# Altium PCB 球锁蓝牙20818.PcbDoc (part 3 of 3)
Units mm, origin at the board's own origin, x right, y up, seen from the top; angles counter-clockwise.
Board outline 49.43 x 48.4 mm, 2 copper layers (Top Layer, Bottom Layer); 90 components, 56 nets, 267 pads, 205 vias.
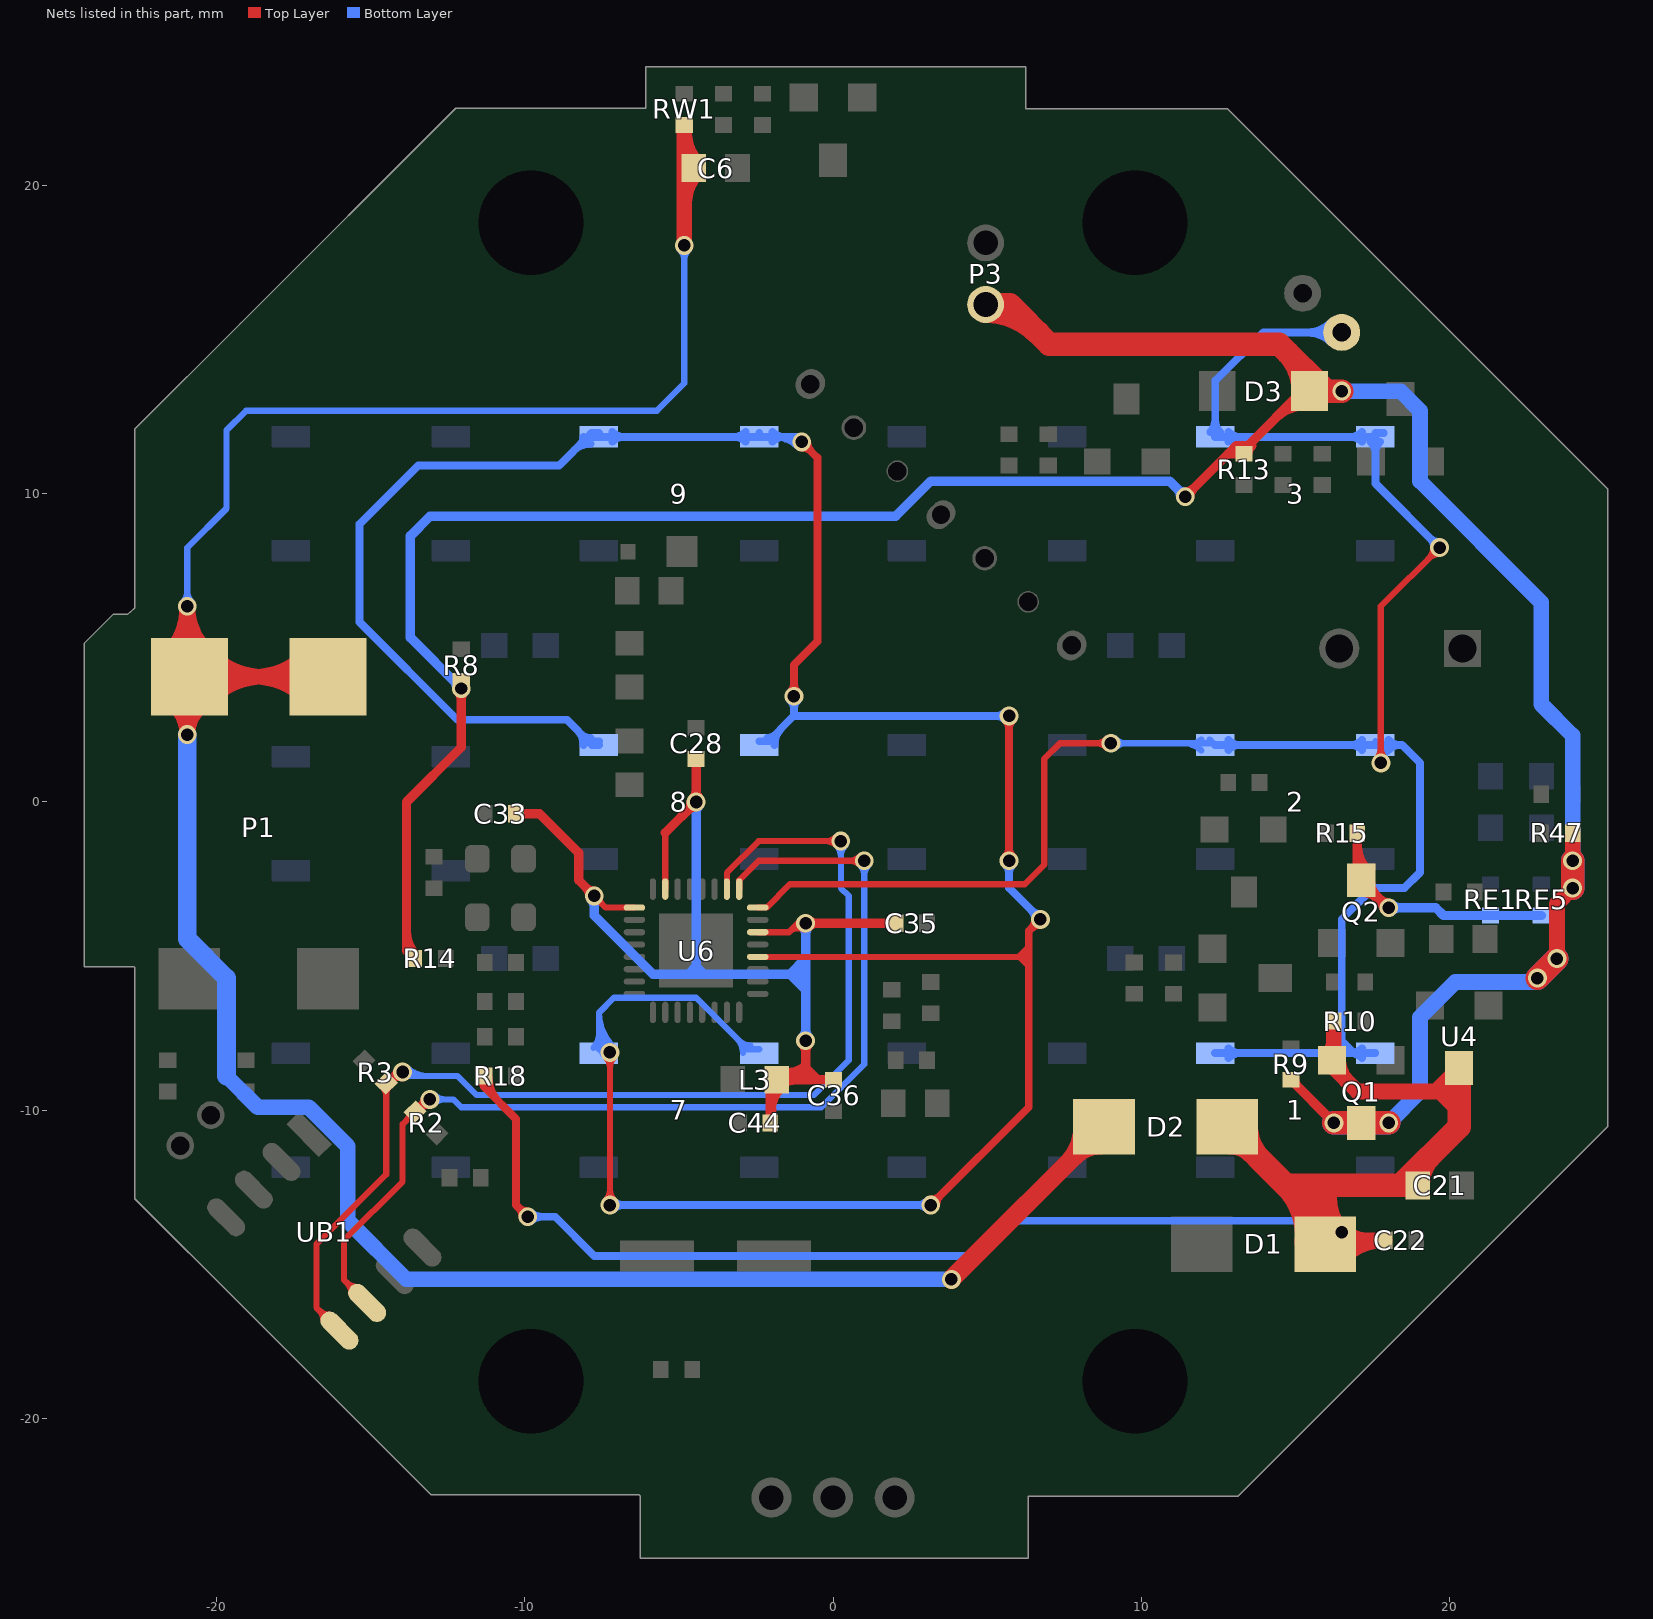
[diagram p3: the nets of this part, all layers, seen from the top]

## Via types
v1: diameter 0.61, hole 0.406, Top Layer to Bottom Layer, tented both sides, 204 vias
v2: diameter 0.6, hole 0.4, Top Layer to Bottom Layer, tented both sides, 1 vias

## Nets (pads, with @x,y where several pads share a name; then routed paths per layer and width w, separated by ;. In a path a pad name is that pad's centre, name@x,y a point inside that pad or via, vN(x,y) a via of type N, cw(c..) or ccw(c..) an arc to the next point about the centre after c; other vN are vias at no path point) (continued)
SCL: R2.2 U6.25 UB1.6 | length 40.1
  Top Layer w0.2: UB1.6@-15.639,-15.939 ccw(c-16.122,-15.939) -15.78,-15.598 ccw(c-15.439,-15.256) UB1.6@-15.439,-15.739 ; UB1.6@-15.121,-16.257 -15.875,-15.503 -15.875,-14.224 -13.97,-12.319 -13.97,-10.458 R2.2@-13.567,-10.055 ; R2.2@-13.739,-10.073 cw(c-14.111,-10.073) -13.848,-10.336 cw(c-13.585,-10.599) R2.2@-13.585,-10.227 ; R2.2@-13.549,-9.883 ccw(c-13.549,-9.511) -13.286,-9.774 ccw(c-13.023,-10.037) R2.2@-13.395,-10.037 ; R2.2@-13.416,-9.999 cw(c-13.159,-10.147) v1@-13.113,-9.854 ; R2.2@-13.372,-9.859 ccw(c-13.579,-9.652) v1@-13.286,-9.652 ; v1@-13.283,-9.621 cw(c-13.63,-9.568) -13.454,-9.871 cw(c-13.274,-10.183) v1@-13.151,-9.844 ; v1@-13.083,-9.857 ccw(c-13.089,-10.533) R2.2@-13.567,-10.055 ; v1(-13.081,-9.652) -13.164,-9.652 R2.2@-13.567,-10.055 ; U6.25@-3.045,-2.826 -3.045,-2.537 -2.413,-1.905 v1(1.016,-1.905) ; v1@0.871,-2.05 ccw(c0.522,-2.399) 0.522,-1.905 ccw(c0.522,-1.411) v1@0.871,-1.76
  Bottom Layer w0.2: v1(-13.081,-9.652) -12.319,-9.652 -12.065,-9.906 -0.381,-9.906 1.016,-8.509 v1(1.016,-1.905) ; v1@-12.936,-9.797 cw(c-12.587,-10.146) -12.587,-9.652 cw(c-12.587,-9.158) v1@-12.936,-9.507 ; v1@0.871,-2.05 cw(c0.522,-2.399) 1.016,-2.399 cw(c1.51,-2.399) v1@1.161,-2.05
SDA: R3.2 U6.26 UB1.5 | length 42.7
  Top Layer w0.2: UB1.5@-16.537,-16.837 ccw(c-17.02,-16.837) -16.678,-16.496 ccw(c-16.337,-16.154) UB1.5@-16.337,-16.637 ; UB1.5@-16.019,-17.156 -16.764,-16.41 -16.764,-14.351 -14.5,-12.087 R3.2@-14.5,-9.166 ; R3.2@-14.627,-9.249 cw(c-14.933,-9.555) -14.5,-9.555 ; R3.2@-14.5,-9.469 cw(c-14.189,-9.469) R3.2@-14.409,-9.249 ; R3.2@-14.482,-8.95 ccw(c-14.482,-8.578) -14.219,-8.841 ccw(c-13.956,-9.104) R3.2@-14.328,-9.104 ; R3.2@-14.478,-9.144 R3.2@-14.5,-9.166 ; R3.2@-14.357,-8.921 cw(c-14.23,-9.142) v1@-14.086,-8.932 ; -14.308,-8.893 ccw(c-14.459,-8.632) v1@-14.168,-8.71 ; v1@-14.005,-8.965 ccw(c-14.1,-9.522) R3.2@-14.5,-9.122 ; v1(-13.97,-8.763) -14.141,-8.763 R3.2@-14.5,-9.122 ; U6.26@-3.445,-2.826 -3.445,-2.302 -2.413,-1.27 v1(0.254,-1.27) ; v1@0.109,-1.415 ccw(c-0.24,-1.764) -0.24,-1.27 ccw(c-0.24,-0.776) v1@0.109,-1.125 ; R3.2@-14.5,-9.166 R3.2@-14.5,-9.122
  Bottom Layer w0.2: v1(-13.97,-8.763) -13.843,-8.89 -12.192,-8.89 -11.576,-9.506 -0.616,-9.506 0.508,-8.382 0.508,-3.048 0.254,-2.794 v1(0.254,-1.27) ; v1@-13.967,-8.76 ccw(c-13.652,-8.445) -13.652,-8.89 ; v1@-13.825,-8.618 ccw(c-13.169,-7.962) -13.169,-8.89 ; v1@0.109,-1.415 cw(c-0.24,-1.764) 0.254,-1.764 cw(c0.748,-1.764) v1@0.399,-1.415
TD1_KEYX_1: 1.2 2.2 3.2 pad.0 U6.24 | length 84.2
  Top Layer w0.2: U6.24@-2.445,-3.426 -2.156,-3.426 -1.397,-2.667 6.223,-2.667 6.858,-2.032
  Top Layer w0.203: 6.858,-2.032 6.858,1.397 7.366,1.905 v1(9.017,1.905) ; v1@8.873,1.761 ccw(c8.526,1.414) 8.526,1.905 ccw(c8.526,2.396) v1@8.873,2.049 ; v1@17.636,1.414 ccw(c17.289,1.761) 17.78,1.761 ccw(c18.271,1.761) v1@17.924,1.414 ; v1(17.78,1.27) 17.78,6.35 v1(19.685,8.255) ; v1@19.482,8.255 cw(c18.991,8.255) 19.338,7.908 cw(c19.685,7.561) v1@19.685,8.052
  Bottom Layer w0.203: v1(9.017,1.905) 2.2@12.345,1.905 ; v1@9.161,1.761 cw(c9.508,1.414) 9.508,1.905 cw(c9.508,2.396) v1@9.161,2.049 ; 11.393,1.905 cw(c11.393,1.118) 2.2@11.949,1.674 ; 11.658,1.905 ccw(c11.658,2.317) 2.2@11.949,2.026 ; 2.2@12.218,2.032 2.2@12.345,1.905 ; 2.2@12.4,1.85 2.2@12.345,1.905 ; 2.2@17.604,1.974 17.728,1.85 2.2@17.78,1.798
  Bottom Layer w0.254: 3.2@12.242,12.008 ccw(c11.851,12.399) 12.405,12.399 ; 1.2@12.4,-8.15 16.129,-8.15 ; 2.2@12.4,1.85 2.2@17.6,1.85 17.728,1.85 18.47,1.85 19.05,1.27 19.05,-2.286 18.542,-2.794 17.526,-2.794 16.51,-3.81 16.51,-7.747 ; 3.2@12.4,11.85 3.2@17.6,11.85 ; 3.2@12.405,11.974 12.405,13.675 13.97,15.24 pad.0@16.51,15.24 ; 12.405,12.378 ccw(c12.928,12.378) 3.2@12.558,12.008 ; 1.2@12.833,-8.308 cw(c13.213,-8.688) 13.213,-8.15 cw(c13.213,-7.612) 1.2@12.833,-7.992 ; 2.2@12.833,1.692 cw(c13.213,1.312) 13.213,1.85 cw(c13.213,2.388) 2.2@12.833,2.008 ; 3.2@12.833,11.692 cw(c13.213,11.312) 13.213,11.85 cw(c13.213,12.388) 3.2@12.833,12.008 ; pad.0@16.176,14.906 ccw(c15.368,14.098) 15.368,15.24 ccw(c15.368,16.382) pad.0@16.176,15.574 ; 16.51,-7.366 16.51,-7.747 ; 1.2@17.167,-8.308 ccw(c16.787,-8.688) 16.787,-8.15 ; 1.2@17.167,-7.992 cw(c16.787,-7.612) 16.787,-8.15 ; 2.2@17.167,1.692 ccw(c16.787,1.312) 16.787,1.85 ccw(c16.787,2.388) 2.2@17.167,2.008 ; 3.2@17.167,11.692 ccw(c16.787,11.312) 16.787,11.85 ccw(c16.787,12.388) 3.2@17.167,12.008 ; 3.2@17.442,11.692 cw(c17.051,11.301) 17.604,11.301 ; 1.2@17.6,-8.15 16.913,-8.15 ; 17.604,11.322 cw(c18.128,11.322) 3.2@17.758,11.692 ; v1@17.654,1.396 ccw(c17.351,1.699) 17.78,1.699 ccw(c18.209,1.699) v1@17.906,1.396 ; v1@17.78,1.262 cw(c18.259,1.262) 2.2@17.997,1.663 ; v1(17.78,1.27) 2.2@17.78,1.798 ; 3.2@17.871,11.974 17.604,11.974 17.604,10.336 v1(19.685,8.255) ; 2.2@18.033,1.692 cw(c18.413,1.312) 18.413,1.85 cw(c18.413,2.388) 2.2@18.033,2.008 ; v1@19.507,8.255 ccw(c19.078,8.255) 19.381,8.559 ccw(c19.685,8.862) v1@19.685,8.433 ; 16.129,-8.15 16.51,-7.769 ; 16.129,-8.15 16.51,-8.15 ; 16.51,-8.15 16.51,-7.769 ; 16.51,-8.15 16.787,-8.15 ; 16.51,-7.769 16.51,-7.747 ; 16.51,-7.747 16.913,-8.15 ; 16.787,-8.15 16.913,-8.15
TX2_KEYX_3: 7.2 8.2 9.2 U6.20 | length 117.3
  Top Layer w0.2: U6.20@-2.445,-5.026 6.023,-5.026 ; 6.35,-5.334 6.042,-5.026 ; 6.35,-5.026 6.042,-5.026 ; 6.35,-4.699 6.023,-5.026 ; 6.023,-5.026 6.042,-5.026
  Top Layer w0.203: v1@-7.383,-12.937 ccw(c-7.73,-12.59) -7.239,-12.59 ccw(c-6.748,-12.59) v1@-7.095,-12.937 ; v1@-7.383,-8.272 cw(c-7.73,-8.619) -7.239,-8.619 cw(c-6.748,-8.619) v1@-7.095,-8.272 ; v1(-7.239,-13.081) v1(-7.239,-8.128)
  Top Layer w0.254: v1@-1.396,3.555 ccw(c-1.699,3.858) -1.27,3.858 ccw(c-0.841,3.858) v1@-1.144,3.555 ; v1(-1.27,3.429) -1.27,4.445 -0.508,5.207 -0.508,11.176 v1(-1.016,11.684) ; v1@-1.016,11.506 cw(c-1.016,11.077) -0.712,11.38 cw(c-0.409,11.684) v1@-0.838,11.684 ; v1(3.175,-13.081) 6.35,-9.906 6.35,-5.334 6.35,-5.026 6.35,-4.699 6.35,-4.191 v1(6.731,-3.81) ; v1@3.175,-12.903 ccw(c3.175,-12.474) 3.479,-12.777 ccw(c3.782,-13.081) v1@3.353,-13.081 ; v1@5.589,-1.779 ccw(c5.286,-1.476) 5.715,-1.476 ccw(c6.144,-1.476) v1@5.841,-1.779 ; v1@5.589,2.668 cw(c5.286,2.365) 5.715,2.365 cw(c6.144,2.365) v1@5.841,2.668 ; v1(5.715,-1.905) v1(5.715,2.794) ; v1@6.553,-3.81 cw(c6.124,-3.81) 6.427,-4.114 cw(c6.731,-4.417) v1@6.731,-3.988
  Bottom Layer w0.203: 7.2@-7.776,-7.974 ccw(c-8.211,-7.539) -7.595,-7.539 ; -7.6,-7.671 ccw(c-7.15,-7.411) 7.2@-7.214,-7.926 ; 7.2@-7.595,-8.026 -7.595,-6.833 ; -7.595,-7.773 ccw(c-6.906,-7.773) 7.2@-7.378,-8.276 ; -7.595,-7.561 ccw(c-7.011,-7.561) 7.2@-7.424,-7.974 ; -7.595,-7.304 ccw(c-6.464,-7.304) v1(-7.239,-8.128) ; 7.2@-7.1,-7.98 cw(c-6.022,-6.834) -7.595,-6.834 ; -3.12,-7.675 cw(c-3.596,-8.15) 7.2@-2.923,-8.15 ; -3.048,-7.747 ccw(c-2.675,-7.374) 7.2@-2.675,-7.902 ; 7.2@-2.396,-8.026 -2.769,-8.026 -4.445,-6.35 -7.112,-6.35 -7.595,-6.833
  Bottom Layer w0.254: -8.404,11.408 cw(c-7.875,10.879) 9.2@-7.875,11.627 ; -8.295,2.326 cw(c-8.772,1.85) 8.2@-8.098,1.85 ; 9.2@-8.194,11.618 ccw(c-8.426,11.85) 9.2@-8.098,11.85 ; 8.2@-8.16,2.191 ccw(c-7.875,2.476) 8.2@-7.875,2.073 ; 8.2@-7.6,1.85 -7.819,1.85 8.2@-7.943,1.974 ; 8.2@-7.595,1.974 8.2@-7.943,1.974 ; 9.2@-7.595,11.974 -7.838,11.974 9.2@-7.962,11.85 ; v1(-7.239,-13.081) v1(3.175,-13.081) ; 9.2@-7.167,11.692 cw(c-6.787,11.312) -6.787,11.85 cw(c-6.787,12.388) 9.2@-7.167,12.008 ; v1@-7.113,-13.207 cw(c-6.81,-13.51) -6.81,-13.081 cw(c-6.81,-12.652) v1@-7.113,-12.955 ; 9.2@-2.833,11.692 ccw(c-3.213,11.312) -3.213,11.85 ccw(c-3.213,12.388) 9.2@-2.833,12.008 ; 8.2@-2.396,1.974 -2.09,1.974 -1.27,2.794 ; 8.2@-2.125,2.073 ccw(c-2.125,2.396) 8.2@-1.896,2.168 ; 9.2@-1.967,11.692 cw(c-1.587,11.312) -1.587,11.85 cw(c-1.587,12.388) 9.2@-1.967,12.008 ; 8.2@-1.902,1.85 cw(c-1.149,1.85) -1.681,2.383 ; 9.2@-1.846,11.85 cw(c-1.846,10.854) v1@-1.142,11.558 ; v1@-1.396,3.303 cw(c-1.699,3) -1.27,3 cw(c-0.841,3) v1@-1.144,3.303 ; v1@-1.27,3.175 -1.27,2.794 ; v1(-1.016,11.684) -1.182,11.85 9.2@-2.4,11.85 9.2@-7.6,11.85 9.2@-7.962,11.85 ; v1@3.049,-13.207 ccw(c2.746,-13.51) 2.746,-13.081 ccw(c2.746,-12.652) v1@3.049,-12.955 ; v1@5.589,-2.031 cw(c5.286,-2.334) 5.715,-2.334 cw(c6.144,-2.334) v1@5.841,-2.031 ; v1@5.589,2.668 ccw(c5.286,2.365) 5.286,2.794 ccw(c5.286,3.223) v1@5.589,2.92 ; v1(5.715,-1.905) 5.715,-2.794 v1(6.731,-3.81) ; v1(5.715,2.794) -1.27,2.794 ; v1@6.553,-3.81 ccw(c6.124,-3.81) 6.427,-3.506 ccw(c6.731,-3.203) v1@6.731,-3.632 ; 9.2@-7.962,11.85 -8.89,10.922 -13.462,10.922 -15.367,9.017 -15.367,5.842 -12.192,2.667 -8.636,2.667 8.2@-7.943,1.974
V6V: D3.2 P3.2 Q1.D R8.1 R9.1 R13.1 R14.1 R47.2 | length 110.9
  Top Layer w0.305: -13.843,-4.196 ccw(c-12.73,-4.196) R14.1@-13.517,-4.983 ; R14.1@-13.589,-5.08 -13.843,-4.826 -13.843,0 -12.065,1.778 v2(-12.065,3.683) R8.1@-12.065,3.937 ; v2@-12.169,3.579 cw(c-12.421,3.327) -12.065,3.327 cw(c-11.709,3.327) v2@-11.961,3.579 ; v1(11.43,9.906) 12.827,11.303 ; v1@11.43,10.058 ccw(c11.43,10.426) 11.69,10.166 ccw(c11.95,9.906) v1@11.582,9.906 ; R13.1@13.462,11.303 cw(c13.769,11.303) R13.1@13.552,11.52 ; 13.589,11.557 R13.1@13.335,11.303 12.827,11.303 ; 14.351,12.446 cw(c15.376,11.421) D3.2@15.376,12.871 ; 14.814,12.782 ccw(c14.311,13.285) D3.2@15.022,13.285 ; R9.1@14.859,-9.017 v1(16.256,-10.414) ; D3.2@14.965,12.933 cw(c15.47,12.428) D3.2@15.47,13.142 ; R9.1@14.986,-9.017 ccw(c15.293,-9.017) R9.1@15.076,-9.234 ; D3.2@15.24,13.335 13.462,11.557 13.081,11.557 12.827,11.303 ; v1@16.104,-10.414 ccw(c15.736,-10.414) 15.996,-10.154 ccw(c16.256,-9.894) v1@16.256,-10.262
  Top Layer w0.508: D3.2@15.24,13.335 D3.2@15.47,13.335 ; v1(23.495,-5.08) 23.495,-3.302 v1(24.003,-2.794) ; v1(24.003,-1.905) R47.2@24.003,-1.016
  Top Layer w0.762: P3.2@4.953,15.926 cw(c4.953,13.521) 6.653,15.222 ; P3.2@4.953,16.145 5.73,16.145 7.016,14.859 14.478,14.859 16.002,13.335 v1(16.51,13.335) ; 14.755,14.582 cw(c13.559,13.385) D3.2@15.251,13.385 ; v1(16.256,-10.414) Q1.D@17.145,-10.414 v1(18.034,-10.414) ; v1(22.86,-5.715) v1(23.495,-5.08) ; v1(24.003,-2.794) v1(24.003,-1.905)
  Bottom Layer w0.305: v2@-12.213,3.683 ccw(c-12.569,3.683) -12.317,3.935 ccw(c-12.065,4.187) v2@-12.065,3.831 ; v2(-12.065,3.683) -13.716,5.334 -13.716,8.636 -13.081,9.271 2.032,9.271 3.175,10.414 10.922,10.414 v1(11.43,9.906) ; v1@11.278,9.906 ccw(c10.91,9.906) 11.17,10.166 ccw(c11.43,10.426) v1@11.43,10.058
  Bottom Layer w0.508: v1(16.51,13.335) 18.415,13.335 19.05,12.7 19.05,10.414 22.987,6.477 22.987,3.175 24.003,2.159 v1(24.003,-1.905) ; v1(18.034,-10.414) 19.05,-9.398 19.05,-6.985 20.193,-5.842 22.733,-5.842 v1(22.86,-5.715) ; 22.431,-5.842 ccw(c22.431,-5.286) v1@22.824,-5.679
  Bottom Layer w0.762: v1(16.256,-10.414) v1(18.034,-10.414) ; v1(22.86,-5.715) v1(23.495,-5.08) ; v1(24.003,-2.794) v1(24.003,-1.905)
VBAT: C21.1 C22.1 D1.2 D2.2 Q1.S R10.1 R18.1 U4.3 | length 79.1
  Top Layer w0.254: R18.1@-11.43,-8.915 ccw(c-10.878,-8.915) -11.268,-9.306 ; R18.1@-11.393,-9.005 cw(c-11.61,-9.222) -11.303,-9.222 cw(c-10.996,-9.222) R18.1@-11.213,-9.005 ; R18.1@-11.303,-8.89 -11.303,-9.271 -10.287,-10.287 -10.287,-13.081 v1(-9.906,-13.462) ; R18.1@-11.176,-8.915 ccw(c-10.011,-8.915) -10.835,-9.739 ; v1@-10.084,-13.462 ccw(c-10.513,-13.462) -10.21,-13.158 ccw(c-9.906,-12.855) v1@-9.906,-13.284
  Top Layer w0.5: Q1.S@16.048,-8.235 ccw(c15.547,-7.734) 16.256,-7.734 ; Q1.S@16.256,-8.067 R10.1@16.256,-7.239
  Top Layer w0.508: D1.2@15.97,-14.351 D1.2@16.097,-14.224 ; Q1.S@16.256,-8.067 16.256,-8.636 17.018,-9.398 19.558,-9.398 ; Q1.S@16.398,-8.382 ccw(c17.355,-8.382) 16.678,-9.058 ; D1.2@16.461,-13.955 cw(c16.097,-13.843) D1.2@16.097,-14.224 ; D1.2@16.523,-14.019 cw(c16.62,-14.382) D1.2@16.808,-14.057 ; D1.2@16.527,-13.894 ccw(c17.323,-13.098) 17.323,-14.224 ; D1.2@16.532,-14.803 cw(c17.907,-16.147) C22.1@17.907,-14.224 D1.2@16.097,-14.224 ; D1.2@16.546,-13.934 ccw(c17.246,-13.234) 17.246,-14.224 ; 19.815,-9.141 cw(c20.32,-9.647) U4.3@20.32,-8.932 ; U4.3@20.136,-8.816 cw(c19.672,-9.035) 20.035,-9.398 ; 20.32,-10.033 19.685,-9.398 ; U4.3@20.32,-9.113 20.035,-9.398 ; U4.3@20.32,-8.636 19.558,-9.398 ; 19.558,-9.398 19.685,-9.398 ; 19.685,-9.398 20.035,-9.398 ; D1.2@16.152,-14.169 cw(c16.51,-14.527) 16.51,-14.021 ccw(c16.51,-14.527) D1.2@16.152,-14.169
  Top Layer w0.762: D2.2@12.795,-10.541 14.7,-12.446 ; D2.2@12.895,-11.06 cw(c12.895,-12.072) D2.2@13.61,-11.356 ; D2.2@13.414,-10.541 ccw(c14.908,-10.541) 13.852,-11.598 ; D1.2@15.354,-14.296 ccw(c13.091,-14.055) 14.7,-12.446 ; D1.2@15.603,-13.984 ccw(c14.717,-13.098) 15.97,-13.098 ccw(c17.223,-13.098) D1.2@16.337,-13.984 ; D1.2@15.97,-14.631 cw(c16.749,-14.631) D1.2@16.484,-13.898 ; D1.2@15.97,-14.351 D1.2@15.97,-13.716 ; 15.97,-12.85 ccw(c17.63,-12.85) D1.2@16.456,-14.024 ; C21.1@18.962,-12.411 ccw(c18.708,-12.739) 18.415,-12.446 ; C21.1@18.974,-12.446 18.415,-12.446 ; C21.1@18.993,-12.396 cw(c20.267,-12.396) 19.366,-11.495 ; U4.3@20.32,-9.113 20.32,-10.033 20.32,-10.541 18.415,-12.446 ; 14.7,-12.446 15.97,-12.446 ; 14.7,-12.446 D1.2@15.97,-13.716 ; D1.2@15.97,-13.716 15.97,-12.446 ; 15.97,-12.446 18.415,-12.446 ; D1.2@16.152,-13.898 ccw(c16.51,-13.54) 16.51,-14.046 cw(c16.51,-13.54) D1.2@16.152,-13.898
  Bottom Layer w0.254: v1(-9.906,-13.462) -9.017,-13.462 -7.747,-14.732 4.572,-14.732 5.715,-13.589 16.129,-13.589 v1(16.51,-13.97) ; v1@-9.78,-13.588 cw(c-9.477,-13.891) -9.477,-13.462 cw(c-9.477,-13.033) v1@-9.78,-13.336 ; v1@16.332,-13.97 ccw(c15.903,-13.97) 16.206,-13.666 ccw(c16.51,-13.363) v1@16.51,-13.792
VBUS: C6.1 D2.1 P1.2 RW1.1 | length 104.5
  Top Layer w0.508: P1.2@-21.594,4.769 ccw(c-23.136,6.311) v1@-20.955,6.311 ; P1.2@-21.492,3.272 cw(c-22.315,2.189) v1(-20.955,2.19) ; P1.2@-20.889,4.065 P1.2@-16.389,4.065 ; P1.2@-20.377,3.211 ccw(c-19.763,2.189) v1(-20.955,2.19) ; P1.2@-20.247,4.826 cw(c-18.961,6.35) v1(-20.955,6.35) v1(-20.955,2.19) ; P1.2@-20.185,3.36 cw(c-18.485,1.66) -18.485,4.065 cw(c-18.485,6.469) P1.2@-20.185,4.769 ; P1.2@-17.094,3.36 ccw(c-18.794,1.66) -18.794,4.065 ccw(c-18.794,6.469) P1.2@-17.094,4.769 ; v1(-4.826,18.065) RW1.1@-4.826,21.971 ; -4.826,19.436 cw(c-3.433,19.436) C6.1@-4.418,20.421 ; -4.826,21.712 ccw(c-3.433,21.712) C6.1@-4.418,20.727
  Top Layer w0.61: v1(3.842,-15.494) D2.1@8.795,-10.541 ; 7.608,-11.728 ccw(c6.421,-10.541) D2.1@8.1,-10.541 ; 7.85,-11.486 cw(c8.695,-12.332) D2.1@8.695,-11.136
  Bottom Layer w0.203: v1@-21.099,6.494 ccw(c-21.446,6.841) -20.955,6.841 ccw(c-20.464,6.841) v1@-20.811,6.494 ; v1(-20.955,6.35) -20.955,8.255 -19.685,9.525 -19.685,12.065 -19.05,12.7 -5.715,12.7 -4.826,13.589 v1(-4.826,18.065) ; v1@-4.97,17.921 cw(c-5.317,17.574) -4.826,17.574 cw(c-4.335,17.574) v1@-4.682,17.921
  Bottom Layer w0.508: -19.685,-8.89 -18.669,-9.906 -17.018,-9.906 -15.748,-11.176 -15.748,-13.589 -13.843,-15.494 v1(3.842,-15.494)
  Bottom Layer w0.61: v1(-20.955,2.19) -20.955,-4.445 -19.685,-5.715 -19.685,-8.89
VDD: C28.2 C33.2 C35.2 C36.2 C44.2 L3.1 U6.1 U6.22 U6.31 | length 53
  Top Layer w0.2: v1@-7.753,-3.195 cw(c-7.753,-3.563) -7.492,-3.303 cw(c-7.232,-3.042) v1@-7.6,-3.042 ; v1@-7.62,-3.175 -7.369,-3.426 U6.1@-6.445,-3.426 ; U6.31@-5.445,-2.826 -5.445,-1 ; U6.22@-2.445,-4.226 -1.432,-4.226 ; -1.216,-4.01 cw(c-1.001,-4.224) v1@-0.891,-3.941 ; v1@-0.963,-4.128 ccw(c-1.123,-4.535) -1.432,-4.226 ; v1(-0.889,-3.937) -1.143,-3.937 -1.432,-4.226
  Top Layer w0.305: C33.2@-10.287,-0.381 -9.525,-0.381 -8.255,-1.651 -8.255,-2.54 v1(-7.747,-3.048) v1@-7.62,-3.175 ; v1@-7.894,-3.054 ccw(c-8.262,-3.054) -8.002,-2.793 ccw(c-7.741,-2.533) v1@-7.741,-2.901 ; -5.445,-1 v1(-4.445,0) C28.2@-4.445,1.397 ; v1@-4.597,0 cw(c-4.965,0) -4.705,-0.26 cw(c-4.445,-0.52) v1@-4.445,-0.152 ; v1@-4.553,0.108 ccw(c-4.813,0.368) -4.445,0.368 ccw(c-4.077,0.368) v1@-4.337,0.108 ; C44.2@-2.032,-10.414 -2.032,-9.22 L3.1@-1.829,-9.017 -1.359,-9.017 ; C44.2@-2.032,-10.155 cw(c-0.74,-10.155) L3.1@-1.654,-9.242 ; L3.1@-2.032,-9.419 cw(c-1.476,-9.419) L3.1@-1.869,-9.027 ; -1.989,-9.995 ccw(c-1.553,-10.112) C44.2@-1.944,-10.338 ; L3.1@-1.849,-9.021 ccw(c-1.644,-8.466) -1.226,-8.884 ; L3.1@-1.743,-8.735 ccw(c-1.463,-7.973) -0.889,-8.547 ; L3.1@-1.654,-9.192 cw(c-1.231,-9.615) -1.231,-9.017 cw(c-1.231,-8.419) L3.1@-1.654,-8.842 ; v1@-0.997,-7.855 cw(c-1.257,-8.115) -0.889,-8.115 cw(c-0.521,-8.115) v1@-0.781,-7.855 ; v1(-0.889,-7.747) -0.889,-8.547 ; v1(-0.889,-3.937) C35.2@2.032,-3.937 ; v1@-0.781,-4.045 cw(c-0.521,-4.305) -0.521,-3.937 cw(c-0.521,-3.569) v1@-0.781,-3.829 ; C36.2@0.019,-9.017 -0.508,-9.017 ; -1.359,-9.017 ccw(c-1.359,-9.339) -1.625,-9.157 cw(c-1.359,-9.339) -1.359,-9.017 ; -1.359,-9.017 cw(c-1.359,-8.695) -1.625,-8.877 ccw(c-1.359,-8.695) -1.359,-9.017 ; -1.359,-9.017 -0.889,-8.547 ; -1.359,-9.017 -0.889,-9.017 ; -0.889,-9.017 -0.889,-8.636 ; -0.889,-9.017 -0.508,-9.017 ; -0.889,-8.636 -0.508,-9.017 ; -0.889,-8.636 -0.889,-8.547
  Bottom Layer w0.305: v1@-7.855,-3.169 cw(c-8.115,-3.429) -7.747,-3.429 cw(c-7.379,-3.429) v1@-7.639,-3.169 ; v1(-7.747,-3.048) -7.747,-3.683 -5.842,-5.588 -4.699,-5.588 ; v1@-4.553,-0.108 cw(c-4.813,-0.368) -4.445,-0.368 cw(c-4.077,-0.368) v1@-4.337,-0.108 ; v1(-4.445,0) -4.445,-5.334 ; v1@-0.997,-7.639 ccw(c-1.257,-7.379) -0.889,-7.379 ccw(c-0.521,-7.379) v1@-0.781,-7.639 ; v1@-0.997,-4.045 cw(c-1.257,-4.305) -0.889,-4.305 cw(c-0.521,-4.305) v1@-0.781,-4.045 ; v1(-0.889,-7.747) -0.889,-6.096 ; -0.889,-4.763 -0.889,-5.08 ; v1(-0.889,-3.937) -0.889,-5.08 ; -4.699,-5.588 -4.445,-5.334 ; -4.699,-5.588 -4.445,-5.588 ; -4.445,-5.588 -4.445,-5.334 ; -4.445,-5.588 -4.191,-5.588 ; -4.445,-5.334 -4.191,-5.588 ; -4.191,-5.588 -1.397,-5.588 ; -1.397,-5.588 -0.889,-6.096 ; -1.397,-5.588 -0.889,-5.588 ; -1.397,-5.588 -0.889,-5.08 ; -0.889,-6.096 -0.889,-5.588 ; -0.889,-5.588 -0.889,-5.08
VDD3V3: Q2.D R15.2 RE1.1 RE5.1 | length 12
  Top Layer w0.2: 16.967,-1.702 16.967,-1.62
  Top Layer w0.305: 17.018,-1.405 ccw(c18.187,-1.405) Q2.D@17.361,-2.232 ; R15.2@17.018,-1.016 17.018,-2.667 Q2.D@17.145,-2.794 ; Q2.D@17.145,-2.938 cw(c17.145,-3.897) v1@17.824,-3.219 ; Q2.D@17.145,-2.54 v1(18.034,-3.429) ; Q2.D@17.45,-2.633 ccw(c17.962,-2.633) Q2.D@17.6,-2.995 ; Q2.D@17.593,-3.085 cw(c17.278,-3.632) v1@17.887,-3.468 ; v1@17.882,-3.429 ccw(c17.514,-3.429) 17.774,-3.169 ccw(c18.034,-2.909) v1@18.034,-3.277
  Bottom Layer w0.305: v1(18.034,-3.429) 19.558,-3.429 19.812,-3.683 RE1.1@21.336,-3.683 RE5.1@22.987,-3.683 ; v1@18.142,-3.537 cw(c18.402,-3.797) 18.402,-3.429 cw(c18.402,-3.061) v1@18.142,-3.321
pads on no net: *.1@-17.6,-11.85 U6.9 U6.13 UB1. UB1.3 UB1.7 Y2.3

## Polygon pours and split planes (outlines as drawn)
GND on Top Layer "Top Layer-GND" (hatched 45Degree grid 0.279 track 0.381, remove dead copper, pour order 4): -28.321,-25.908 30.226,-25.908 30.226,26.543 -28.829,26.543 -28.829,-25.908 -28.194,-25.908
GND on Bottom Layer "Bottom Layer-GND" (hatched 45Degree grid 0.279 track 0.381, remove dead copper, pour order 3): -28.321,-25.908 30.226,-25.908 30.226,26.543 -28.829,26.543 -28.829,-25.908 -28.194,-25.908

## Keep-outs
Keep-Out Layer:
  circle w0.1: c-22.642,-1.112 r0.5
  circle w0.1: c-17.702,-1.112 r0.5
  circle w0.1: c0,-18.17 r1
  circle w0.1: c0,18 r1
  pour cut-out: 14.224,16.002 14.224,17.018 14.732,17.526 15.748,17.526 17.653,15.621 17.653,14.859 17.018,14.224 16.002,14.224
  pour cut-out: -19.05,-9.652 -19.558,-9.144 -20.701,-9.144 -22.098,-10.541 -22.098,-11.43 -21.59,-11.938 -20.447,-11.938 -19.05,-10.541
  pour cut-out: -9.8,-15.8 ccw(c-9.8,-18.8) -12.8,-18.8 ccw(c-9.8,-18.8) -9.8,-21.8 ccw(c-9.8,-18.8) -6.8,-18.8 ccw(c-9.8,-18.8)
  pour cut-out: 9.8,-15.8 ccw(c9.8,-18.8) 6.8,-18.8 ccw(c9.8,-18.8) 9.8,-21.8 ccw(c9.8,-18.8) 12.8,-18.8 ccw(c9.8,-18.8)
  pour cut-out: 9.8,21.8 ccw(c9.8,18.8) 6.8,18.8 ccw(c9.8,18.8) 9.8,15.8 ccw(c9.8,18.8) 12.8,18.8 ccw(c9.8,18.8)
  pour cut-out: -9.8,21.8 ccw(c-9.8,18.8) -12.8,18.8 ccw(c-9.8,18.8) -9.8,15.8 ccw(c-9.8,18.8) -6.8,18.8 ccw(c-9.8,18.8)
  lines w0.15: -22.66,10.566 -22.66,4.65 -23.7,4.65 ccw(c-23.7,4.15) -24.2,4.15 -24.2,-4.85 ccw(c-23.7,-4.85) -23.7,-5.35 -22.66,-5.35 -22.659,-10.566 ; -22.658,-10.566 ccw(c0,0) -10.26,-22.797 -6.3,-22.797 -6.3,-24.4 6.3,-24.4 6.3,-22.8 10.26,-22.8 ; -22.658,10.566 cw(c0,0) -10.692,22.598 ; -10.693,22.6 -6.3,22.6 -6.3,24 6.3,24 6.3,22.6 10.693,22.6 ; 10.26,-22.797 ccw(c0,0) 10.692,22.598

## Other copper
Top Layer:
  region net M3V3: 2.032,-8.382 1.524,-7.874 1.016,-8.382 1.524,-8.89
  region net M3V3: 2.413,-10.287 2.413,-7.874 1.524,-7.874 1.524,-10.287
  region net GND: 20.574,9.525 20.574,12.065 18.923,12.065 18.923,9.525
  region net GND: -9.054,-2.19 -9.305,-1.939 -9.502,-2.136 -9.251,-2.388
  region net GND: -10.287,-1.168 -10.287,-1.016 -10.795,-1.016 -10.795,-1.168
  region net GND: 0.019,-10.681 0.019,-10.033 -0.654,-10.033 -0.654,-10.681
  region net GND: 1.13,-9.893 0.767,-9.53 -0.607,-10.903 -0.243,-11.267
  region net GND: 0.635,-10.287 0.635,-9.652 -0.831,-9.652 -0.831,-10.287
  region net NetD3_1: 9.376,12.932 8.868,13.44 8.509,13.081 9.017,12.573
  region net NetD3_1: 10.605,13.145 10.224,13.526 9.652,12.954 10.033,12.573
  region net NetD3_1: 10.033,12.573 10.033,13.335 9.017,13.335 9.017,12.573
  region net GND: -10.668,-13.208 -10.668,-11.176 -11.811,-11.176 -11.811,-13.208
  region net GND: -3.486,-5.991 -3.935,-5.542 -4.294,-5.901 -3.845,-6.35
  region net GND: 24.638,-0.41 24.638,0.973 23.495,0.973 23.495,-0.41
  region net GND: -5.207,-19.558 -5.207,-17.145 -6.765,-17.145 -6.765,-19.558
  region net NetL3_2: -2.794,-8.509 -3.238,-8.064 -3.683,-8.509 -3.239,-8.954
  region net NetL3_2: -2.921,-8.382 -3.09,-8.213 -3.406,-8.528 -3.237,-8.698
  region net GND: 19.558,-14.859 19.558,-13.5 18.572,-13.5 18.572,-14.859
  region net GND: 20.955,-12.827 20.955,-11.811 20.066,-11.811 20.066,-12.827
  region net GND: 21.509,-11.892 20.747,-11.13 19.939,-11.938 20.701,-12.7
  region net GND: 20.955,-12.827 20.506,-12.378 19.807,-13.077 20.256,-13.526
  region net GND: 22.172,-6.731 22.172,-1.905 20.447,-1.905 20.447,-6.731
  region net GND: -4.064,-15.506 -4.064,-14.097 -7.533,-14.097 -7.533,-15.506
  region net GND: -4.443,-14.095 -5.205,-13.333 -6.096,-14.224 -5.334,-14.986
  region net GND: -16.557,-8.636 -16.557,-4.064 -22.225,-4.064 -22.225,-8.636
  region net GND: -14.519,-7.142 -14.519,-4.342 -17.491,-4.342 -17.491,-7.142
  region net VBUS: -15.113,2.794 -15.113,5.334 -22.141,5.334 -22.141,2.794
  region net GND: -0.099,22.352 -0.099,23.622 -1.651,23.622 -1.651,22.352
  region net GND: 13.153,-1.708 13.153,1.788 11.811,1.788 11.811,-1.708
  region net GND: 4.699,-4.318 4.699,-3.429 2.667,-3.429 2.667,-4.318
  region net VBAT: 17.145,-15.367 17.145,-12.573 14.859,-12.573 14.859,-15.367
  region net VBAT: 18.034,-14.478 17.495,-13.939 16.606,-14.828 17.145,-15.367
  region net VBAT: 18.161,-14.732 18.161,-12.573 17.145,-12.573 17.145,-14.732
  region net VBAT: 19.431,-12.954 19.431,-12.065 17.653,-12.065 17.653,-12.954
  region net VBAT: 18.86,-12.764 18.415,-12.319 17.517,-13.217 17.961,-13.662
  region net NetD1_1: 13.081,-15.367 13.081,-13.335 10.922,-13.335 10.922,-15.367
  region net NetD1_1: 11.938,-14.351 10.922,-13.335 9.906,-14.351 10.922,-15.367
  region net GND: -9.251,-2.388 -9.251,-1.27 -10.363,-1.27 -10.363,-2.388
  region net GND: -10.109,-2.134 -10.236,-2.007 -10.49,-2.261 -10.363,-2.388
  region net GND: -9.652,-2.261 -9.652,-1.397 -10.49,-1.397 -10.49,-2.261
  region net GND: -10.922,-1.143 -10.922,0.358 -12.065,0.358 -12.065,-1.143
  region net GND: -9.093,-1.346 -9.423,-1.016 -9.716,-1.308 -9.385,-1.638
  region net GND: -9.423,-1.397 -9.423,-1.016 -10.541,-1.016 -10.541,-1.397
  region net GND: -3.302,2.159 -3.302,3.175 -5.334,3.175 -5.334,2.159
  region net GND: 22.121,-7.061 22.121,-6.452 20.701,-6.452 20.701,-7.061
  region net GND: 20.955,-6.807 20.599,-6.452 20.345,-6.706 20.701,-7.061
  region net VDD: 2.286,-4.318 2.286,-3.556 1.778,-3.556 1.778,-4.318
  region net VDD: 2.159,-3.937 1.778,-3.556 1.397,-3.937 1.778,-4.318
  region net GND: -10.287,-1.143 -10.287,-1.016 -11.049,-1.016 -11.049,-1.143
  region net VDD: -9.906,-0.762 -9.906,0 -10.541,0 -10.541,-0.762
  region net VDD: -9.525,-0.381 -9.906,0 -10.287,-0.381 -9.906,-0.762
  region net RX2/SETKEY: -4.191,-18.669 -4.191,-18.034 -4.953,-18.034 -4.953,-18.669
  region net RX2/SETKEY: -4.191,-18.669 -4.572,-18.288 -4.953,-18.669 -4.572,-19.05
  region net GND: -2.794,-12.446 -2.794,-10.033 -4.318,-10.033 -4.318,-12.446
  region net GND: -3.302,-10.16 -3.67,-9.792 -3.994,-10.115 -3.625,-10.483
  region net GND: -2.337,-11.252 -2.997,-10.592 -4.14,-11.735 -3.48,-12.395
  region net NetC37_2: 2.286,-6.477 2.286,-5.842 1.524,-5.842 1.524,-6.477
  region net NetC37_2: 1.842,-6.159 1.524,-5.842 1.207,-6.16 1.524,-6.477
  region net NetC37_1: 2.286,-7.493 2.286,-6.858 1.524,-6.858 1.524,-7.493
  region net NetC37_1: 1.842,-7.176 1.524,-6.858 1.207,-7.176 1.524,-7.493
  region net V6V: 13.843,10.922 13.843,11.938 12.573,11.938 12.573,10.922
  region net GND: 10.922,9.557 10.922,11.919 9.652,11.919 9.652,9.557
  region net GND: 11.43,10.795 11.43,11.938 10.539,11.938 10.539,10.795
  region net GND: 11.43,10.795 10.826,11.399 10.169,10.742 10.773,10.138
  region net V6V: 16.129,12.573 16.129,14.097 14.732,14.097 14.732,12.573
  region net V6V: 16.891,13.335 16.129,14.097 15.367,13.335 16.129,12.573
  region net VDD: -4.064,1.143 -4.064,1.778 -4.826,1.778 -4.826,1.143
  region net VDD: -4.064,1.143 -4.445,1.524 -4.826,1.143 -4.445,0.762
  region net NetLED6_1: -12.065,-5.461 -12.065,-4.699 -12.827,-4.699 -12.827,-5.461
  region net NetLED2_1: -11.684,4.699 -11.684,5.207 -12.446,5.207 -12.446,4.699
  region net NetLED2_1: -11.684,5.207 -12.065,5.588 -12.446,5.207 -12.065,4.826
  region net V6V: -11.684,3.81 -11.684,4.318 -12.446,4.318 -12.446,3.81
  region net V6V: -11.684,3.81 -12.065,4.191 -12.446,3.81 -12.065,3.429
  region net NetL3_2: -2.794,-9.525 -2.794,-8.509 -3.683,-8.509 -3.683,-9.525
  region net V6V: -13.208,-5.461 -13.208,-4.699 -13.97,-4.699 -13.97,-5.461
  region net M3V3: 17.526,-4.191 17.653,-4.064 18.796,-4.064 19.05,-3.81 19.05,-1.524 20.193,-2.667 20.193,-5.08 19.939,-5.334 19.939,-6.985 19.812,-7.112 18.923,-7.112 18.669,-6.858 18.669,-5.334 18.415,-5.08 17.653,-5.08 17.526,-4.953
  region net RSTN: -6.223,-6.147 -6.756,-6.147 -7.112,-6.502 -7.112,-7.239 -6.985,-7.366 -6.604,-7.366 -6.299,-7.061 -6.299,-6.452 -6.147,-6.299 -6.147,-6.223
  region net M3V3: -3.048,-6.477 -2.997,-6.502 -2.794,-6.706 -2.794,-6.96 -2.997,-7.163 -3.048,-7.112
  region net NetC30_1: -6.985,4.318 -7.112,4.191 -7.112,1.524 -6.985,1.397 -6.223,1.397 -6.096,1.524 -6.096,4.191 -6.223,4.318
  region net GND: -5.715,23.622 -3.175,23.622 -3.048,23.495 -3.048,22.86 -3.175,22.733 -5.715,22.733 -5.842,22.86 -5.842,23.495
  region net NetL2_2: -5.766,-2.515 -5.766,-3.048 -5.867,-3.048 -6.604,-2.311 -6.604,-1.753 -6.528,-1.753
  region net GND: -3.683,8.636 -5.334,8.636 -5.715,8.255 -5.715,4.953 -5.207,4.445 -4.064,4.445 -2.413,6.096 -2.413,9.144 -3.175,9.144
  region net GND: -13.335,-2.667 -13.208,-2.54 -11.684,-2.54 -11.049,-3.175 -11.049,-8.001 -11.176,-8.128 -11.811,-8.128 -13.237,-6.702 -13.237,-5.842 -13.11,-5.715 -11.811,-5.715 -11.684,-5.588 -11.684,-4.699 -11.938,-4.445 -13.208,-4.445 -13.335,-4.318
  region net GND: -6.223,4.572 -6.096,4.699 -6.096,8.382 -6.477,8.763 -6.858,8.763 -7.112,8.509 -7.112,4.699 -6.985,4.572
  region net NetL2_2: -6.096,0.127 -6.096,1.016 -6.223,1.143 -6.985,1.143 -7.112,1.016 -7.112,0.127 -6.604,-0.381
  pour cut-out: 6.731,19.304 6.35,19.685 3.81,19.685 3.429,19.304 3.429,15.621 3.81,15.24 6.35,15.24 6.731,15.621
  region net VDD: -1.651,-10.668 -1.651,-9.779 -1.27,-9.398 0.254,-9.398 0.381,-9.271 0.381,-8.509 -0.762,-7.366 -1.27,-7.366 -2.413,-8.509 -2.413,-10.668 -2.286,-10.795 -1.778,-10.795
  region net GND: 2.921,-6.477 2.667,-6.731 2.667,-10.541 3.175,-11.049 3.429,-11.049 4.445,-10.033 4.445,-5.842 3.81,-6.477
  region net M3V3: -3.175,-15.24 -3.302,-15.113 -3.302,-13.97 -2.921,-13.589 -0.508,-13.589 0.254,-12.827 0.635,-12.827 0.635,-13.97 -0.635,-15.24
  pour cut-out: -1.651,-2.032 -1.651,-7.62 -7.239,-7.62 -7.239,-2.032
  pour cut-out: -5.969,-3.175 -6.35,-3.175 -7.62,-1.905 -7.62,7.62 -8.255,8.255 -19.685,8.255 -20.32,8.89 -20.32,11.43 -21.59,12.7 -21.59,13.97 -12.7,22.86 -8.89,22.86 -6.985,20.955 -6.985,19.685 -2.921,15.621 -2.921,9.144 -3.81,8.255 -5.08,8.255 -5.461,7.874 -5.461,-2.667
Bottom Layer:
  region net NetLED2_2: -9.525,4.318 -9.525,4.826 -9.779,4.826 -9.779,4.318
  region net NetLED2_2: -8.763,4.572 -8.763,5.588 -9.779,5.588 -9.779,4.572
  region net NetLED2_1: -10.541,4.572 -10.541,5.588 -11.557,5.588 -11.557,4.572
  region net NetLED2_2: -8.763,-5.588 -8.763,-4.572 -9.906,-4.572 -9.906,-5.588
  region net NetLED6_1: -10.922,-5.08 -11.43,-4.572 -11.938,-5.08 -11.43,-5.588
  region net NetLED6_1: -10.541,-5.588 -10.541,-4.572 -11.43,-4.572 -11.43,-5.588
  region net NetLED4_1: 11.938,5.08 11.43,5.588 10.922,5.08 11.43,4.572
  region net NetLED4_1: 11.43,4.572 11.43,5.588 10.541,5.588 10.541,4.572
  region net NetLED3_1: 11.557,-5.588 11.557,-4.572 10.541,-4.572 10.541,-5.588
  region net NetLED2_2: 9.906,-5.588 9.906,-4.572 8.763,-4.572 8.763,-5.588
  region net NetLED1_1: 21.717,-2.413 21.336,-2.032 20.955,-2.413 21.336,-2.794
  region net NetLED5_1: 23.368,-2.413 22.987,-2.032 22.606,-2.413 22.987,-2.794
  region net NetLED5_1: 23.368,-2.921 23.368,-2.413 22.606,-2.413 22.606,-2.921
  region net NetLED1_1: 21.717,-2.921 21.717,-2.413 20.955,-2.413 20.955,-2.921
  region net NetLED1_1: 21.844,-1.27 21.336,-0.762 20.828,-1.27 21.336,-1.778
  region net NetLED5_1: 23.495,-1.27 22.987,-0.762 22.479,-1.27 22.987,-1.778
  region net NetLED5_1: 23.495,-1.27 23.495,-0.381 22.479,-0.381 22.479,-1.27
  region net NetLED1_1: 21.844,-1.27 21.844,-0.381 20.828,-0.381 20.828,-1.27
  region net P04/LED_RED: 23.495,1.27 22.987,1.778 22.479,1.27 22.987,0.762
  region net P04/LED_RED: 23.495,0.381 23.495,1.27 22.479,1.27 22.479,0.381
  region net P05/LED_GREEN: 21.844,1.27 21.336,1.778 20.828,1.27 21.336,0.762
  region net P05/LED_GREEN: 21.844,0.381 21.844,1.27 20.828,1.27 20.828,0.381
  region net VDD3V3: 21.209,-3.683 20.828,-3.302 20.447,-3.683 20.828,-4.064
  region net VDD3V3: 23.368,-4.064 23.368,-3.302 20.828,-3.302 20.828,-4.064
  region net NetLED2_2: 9.779,4.572 9.779,5.588 8.89,5.588 8.89,4.572
  region net NetLED2_2: 9.779,5.588 9.335,6.033 8.89,5.588 9.334,5.143
  region net GND: 0.762,-24.003 0.762,-20.64 -0.762,-20.64 -0.762,-24.003
  pour cut-out: 6.985,19.05 6.35,19.685 3.81,19.685 3.175,19.05 3.175,15.24 3.81,14.605 6.35,14.605 6.985,15.24
  pour cut-out: -19.685,8.89 -20.32,9.525 -20.32,11.43 -21.59,12.7 -21.59,13.97 -12.7,22.86 -8.89,22.86 -6.985,20.955 -6.985,19.685 -3.175,15.875 -3.175,9.271 -3.556,8.89

## Silkscreen, mask and mechanical layers (free items; w line width, h text height)
Top Overlay:
  circle w0.127: c18.418,4.979 r5
  circle w0.1: c-9.8,-18.8 r2.7
  circle w0.1: c9.8,-18.8 r2.7
  circle w0.1: c-9.8,18.8 r2.7
  circle w0.1: c9.8,18.8 r2.7
  lines w0.127: -22.66,8.45 -1.357,8.45 ; -6.073,22.515 -6.073,19.776 -1.357,19.776 -1.357,8.45
  text "RD" at 14.605,17.78 h0.76
  text "TD" at 17.653,14.605 h0.76
  text "TL-99" at -19.685,12.7 h1.02
  text "JYD-QS-BUTTH" at -19.685,10.541 h1.02
  text "GND" at -3.175,10.16 h0.76 r45
  text "+" at 20.955,9.525 h1.02
  text "V1.0" at -19.685,8.89 h0.76
  text "20-8-18" at -15.875,8.89 h0.76
  text "RST" at -1.524,8.89 h0.76 r45
  text "P06" at 0,7.62 h0.76 r45
  text "P07" at 1.27,6.35 h0.76 r45
  text "P04" at 2.54,5.08 h0.76 r45
  text "P05" at 3.81,3.81 h0.76 r45
  text "M3V3" at 4.699,1.651 h0.76 r45
  text "BTV" at 3.175,-19.05 h0.76 r90
  text "GND" at -3.81,-19.304 h0.76
  text "KEY" at -4.445,-23.495 h0.76 r90